# Altium PCB MiniBox.PcbDoc
Units mil, origin at the board's own origin, x right, y up, seen from the top; angles counter-clockwise.
Board outline 6710 x 1581.28 mil, 2 copper layers (Top Layer, Bottom Layer); 62 components, 52 nets, 283 pads, 150 vias.
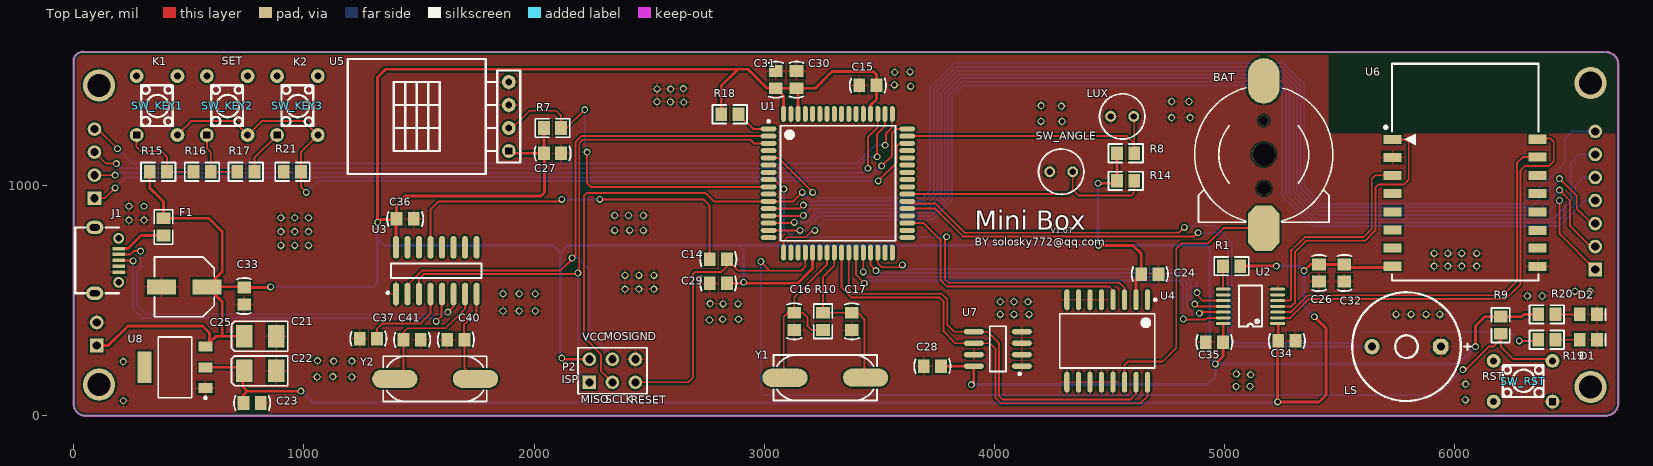
[diagram p0: Top Layer view]
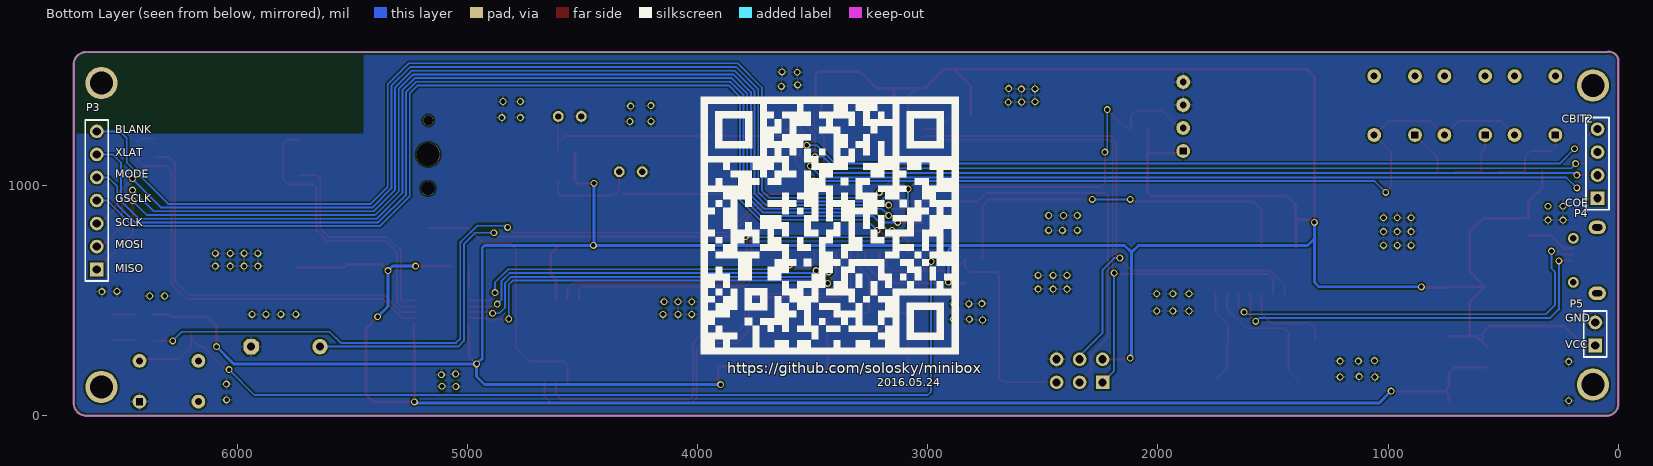
[diagram p1: Bottom Layer view, seen from below]
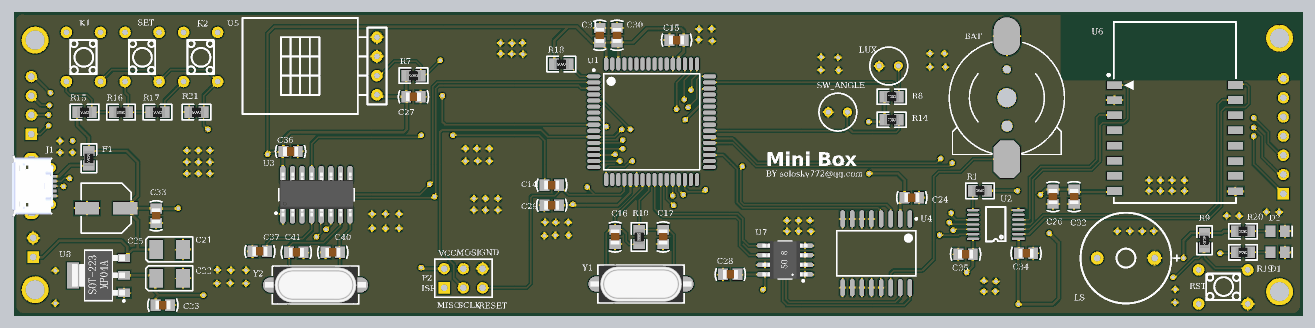
[diagram p2: 3D render of the assembled board from above, using the file's embedded part models]

## Layer stack, top to bottom
Top Solder: solder mask 0.4, Solder Resist, Dk 3.5
Top Layer: signal copper 1.4
Dielectric 1: dielectric 12.6, FR-4, Dk 4.8
Bottom Layer: signal copper 1.4
Bottom Solder: solder mask 0.4, Solder Resist, Dk 3.5

## Board outline
50,0 cw(c50,50) 0,50 0,1550 cw(c40,1540) 50,1580 6650,1580 cw(c6655,1525) 6710,1530 6710,50 cw(c6655,55) 6650,0

## Design rules (kind name [scope] priority, off if disabled: settings)
Clearance [All] p1: gap=8
MinimumSolderMaskSliver [All] p1: minsoldermaskwidth=1
PolygonConnect [All] p1: connectstyle=Relief reliefconductorwidth=10 reliefentries=4 polygonreliefangle="90 Angle" airgapwidth=10
RoutingVias [All] p1: holewidth=20 width=30 viastyle="Through Hole" minholewidth=20 minwidth=30 maxholewidth=20 maxwidth=30
SilkToSolderMaskClearance [IsPad] p1: minsilkscreentomaskgap=3 clearancetoexposedcopper=TRUE
SolderMaskExpansion [All] p1: expansion=4
UnpouredPolygon [All] p1: allowunpoured=FALSE
Width [All] p1: maxlimit=15 minlimit=8 preferedwidth=8
27 further rules are at their usual default settings.

## Components (designator, comment, footprint, x,y, rotation, side; value= is the part's Value field where it differs from the comment)
BAT "CR1220" CR1220 5170,1135 r0 top
C14 "Cap" C-0805 2800,680 r0 top
C15 "Cap" C-0805 3450,1435 r0 top
C16 "Cap" C-0805 3130,410 r90 top
C17 "Cap" C-0805 3380,410 r90 top
C21 "Cap Pol2" CAP-3528 810,345 r0 top
C22 "Cap Pol2" CAP-3528 810,195 r0 top
C23 "Cap" C-0805 775,55 r180 top
C24 "Cap" C-0805 4675,615 r180 top
C25 "Cap Pol2" CAPAE-D 480,560 r180 top
C26 "Cap" C-0805 5410,620 r90 top
C27 "Cap" C-0805 2080,1140 r180 top
C28 "Cap" C-0805 3730,215 r0 top
C29 "Cap" C-0805 2800,575 r180 top
C30 "Cap" C-0805 3140,1460 r90 top
C31 "Cap" C-0805 3050,1460 r90 top
C32 "Cap" C-0805 5520,620 r90 top
C33 "Cap" C-0805 740,520 r270 top
C34 "Cap" C-0805 5270,325 r0 top
C35 "Cap" C-0805 4955,320 r180 top
C36 "Cap" C-0805 1440,855 r180 top
C37 "Cap" C-0805 1280,335 r0 top
C40 "Cap" C-0805 1660,330 r0 top
C41 "Cap" C-0805 1470,330 r180 top
D1 "ST_LED" LED-0805 6580,330 r0 top
D2 "PW_LED" LED-0805 6580,440 r0 top
F1 "Fuse 1" 0805-1 390,820 r90 top
J1 "USB_M" USB_MICRO_5S_B 195,675 r270 top
LS "Buzzer" BEEP-S 5790,300 r180 top
LUX "LUX" AX_2.54 4605,1300 r180 top
P2 "ISP" HDR2X3 2240,145 r0 top
P3 "COL_OUT" HDR1X7 6610,635 r90 bottom locked
P4 "ROW_OUT" HDR1X4 90,945 r90 bottom locked
P5 "PW_OUT" HDR1X2 100,305 r90 bottom locked
R1 "Res2" 0805-1 5030,650 r0 top
R7 "Res2" 0805-1 2080,1250 r180 top
R8 "Res2" 0805-1 4570,1140 r180 top
R9 "Res2" 0805-1 6199,393 r90 top
R10 "Res2" 0805-1 3255,410 r90 top
R14 "Res2" 0805-1 4570,1020 r180 top
R15 "Res2" 0805-1 367.4,1060 r180 top
R16 "Res2" 0805-1 557.4,1060 r180 top
R17 "Res2" 0805-1 747.4,1060 r180 top
R18 "Res2" 0805-1 2850,1310 r180 top
R19 "Res2" 0805-1 6400,330 r180 top
R20 "Res2" 0805-1 6400,440 r180 top
R21 "Res2" 0805-1 950,1060 r180 top
SW_ANGLE "SW-PB" AX_2.54 4340,1060 r180 top
SW_KEY1 "SW-PB" SW_B 470,1180 r90 top
SW_KEY2 "SW-PB" SW_B 775,1180 r90 top
SW_KEY3 "SW-PB" SW_B 1080,1180 r90 top
SW_RST "SW-PB" SW_B 6464,258 r180 top
U1 "ATmega128L-8AC" 64A_N 3320,1010 r0 top locked
U2 "TXB0104" TSSOP-14 5230,400 r180 top
U3 "CH340G" SOIC-16 1575,630 r90 top
U4 "DS3231" SOIC-16W 4490,325 r270 top
U5 "DHT22" DHTxx 1940,1100 r90 top
U6 "ESP-12" ESP_12 5730,1200 r0 top locked
U7 "AT24Cxx" SOIC-8 4015,290 r180 top
U8 "AMS1117" SOT223 440,210 r90 top
Y1 "16MHz" X-SM49 3265,165 r180 top
Y2 "12MHz" X-SM49 1570,160 r180 top

## Footprints (in the part's own frame and the unit in brackets; to place one, negate y for a bottom-side part, rotate by r counter-clockwise, add the part's x,y. Pads: shape width x height; smd on the part's side, far side on the other; paste and mask are expansions set on the pad)
64A_N [mm] "Thin QFP, 64-Leads, Body 14x14mm, Pitch 0.8mm, IPC Medium Density"
  oval 1.75x0.55 smd: 1(-7.65,6) 2(-7.65,5.2) 3(-7.65,4.4) 4(-7.65,3.6) 5(-7.65,2.8) 6(-7.65,2) 7(-7.65,1.2) 8(-7.65,0.4) 9(-7.65,-0.4) 10(-7.65,-1.2) 11(-7.65,-2) 12(-7.65,-2.8) 13(-7.65,-3.6) 14(-7.65,-4.4) 15(-7.65,-5.2) 16(-7.65,-6) 33(7.65,-6) 34(7.65,-5.2) 35(7.65,-4.4) 36(7.65,-3.6) 37(7.65,-2.8) 38(7.65,-2) 39(7.65,-1.2) 40(7.65,-0.4) 41(7.65,0.4) 42(7.65,1.2) 43(7.65,2) 44(7.65,2.8) 45(7.65,3.6) 46(7.65,4.4) 47(7.65,5.2) 48(7.65,6)
  oval 0.55x1.75 smd: 17(-6,-7.65) 18(-5.2,-7.65) 19(-4.4,-7.65) 20(-3.6,-7.65) 21(-2.8,-7.65) 22(-2,-7.65) 23(-1.2,-7.65) 24(-0.4,-7.65) 25(0.4,-7.65) 26(1.2,-7.65) 27(2,-7.65) 28(2.8,-7.65) 29(3.6,-7.65) 30(4.4,-7.65) 31(5.2,-7.65) 32(6,-7.65) 49(6,7.65) 50(5.2,7.65) 51(4.4,7.65) 52(3.6,7.65) 53(2.8,7.65) 54(2,7.65) 55(1.2,7.65) 56(0.4,7.65) 57(-0.4,7.65) 58(-1.2,7.65) 59(-2,7.65) 60(-2.8,7.65) 61(-3.6,7.65) 62(-4.4,7.65) 63(-5.2,7.65) 64(-6,7.65)
  silkscreen extent -7.77,-6.35 6.35,6.95, body extent -7,-7 7,7, height 1.2
0805-1 [mm] "0805带丝印"
  rect 1.3x1.5 smd: 1(-0.95,0) 2(0.95,0)
  silkscreen extent -1.91,-1.02 1.91,1.02, body extent -1,-0.62 1,0.63, height 0.5
AX_2.54 [mm]
  round 1.2 hole 0.7: 1(0,0) 2(2.54,0)
  silkscreen extent -1.23,-2.5 3.77,2.5
BEEP-S [mm] "有源蜂鸣器"
  oct 1.7x1.7 hole 0.9: 1(-3.8,0)
  round 1.7 hole 0.9: 2(3.8,0)
  silkscreen extent -7.11,-6 6,6
C-0805 [mm] "贴片电容"
  rect 1.3x1.5 smd: 1(-0.95,0) 2(0.95,0)
  silkscreen extent -2,-0.79 2,0.79, body extent -1,-0.6 1,0.6, height 0.95
CAP-3528 [mm] "钽电容"
  rect 1.8x2.5 smd: 1(-1.778,0) 2(1.778,0)
  silkscreen extent -3.17,-1.65 3.05,1.65, body extent -1.91,-1.4 1.91,1.4, height 1.1
CAPAE-D [mm] "Aluminum Electrolytic Capacitor, Body 6.60x6.60x5.50mm, IPC Medium Density"
  rect 3.2x1.65 smd: 1(-2.525,0) 2(2.525,0)
  silkscreen extent -3.3,-3.3 3.3,3.3, body extent -3.3,-3.3 3.3,3.3, height 5.5
CR1220 [mm] "钮扣电池"
  round 2.54 hole 2.54: 0(0,0)
  round 1.1 hole 1.1: 0(0,3.75)
  round 1.5 hole 1.5: 0(0.025,-3.75)
  oct 3.5x5 smd: 1(0,-8.128)
  oval 3.5x5 smd: 2(0,8.128)
  silkscreen extent -7.62,-7.5 7.62,7.36
DHTxx [mil]
  round 60 hole 30 square: 1(50,50)
  round 60 hole 30: 2(150,50) 3(250,50) 4(350,50)
  silkscreen extent -50,0 450,750
ESP_12 [mm]
  rect 2x1 smd: 1(0,0) 2(0,-1.97) 3(0,-3.97) 4(0,-5.94) 5(0,-7.98) 6(0,-9.99) 7(0,-11.98) 8(0,-13.99) 9(16,-14.03) 10(16,-11.99) 11(16,-10.03) 12(16,-8.01) 13(16,-5.95) 14(16,-3.97) 15(16,-1.95) 16(16,0.03)
  silkscreen extent -0.91,-15.57 16.08,8.37
HDR1X2 [mm] "Connector; Header; 2 Position"
  rect 1.5x1.5 hole 0.9: 1(0,0)
  round 1.5 hole 0.9: 2(2.54,0)
  silkscreen extent -1.27,-1.27 3.81,1.27
HDR1X4 [mm] "Connector; Header; 4 Position"
  rect 1.5x1.5 hole 0.9: 1(0,0)
  round 1.5 hole 0.9: 2(2.54,0) 3(5.08,0) 4(7.62,0)
  silkscreen extent -1.27,-1.27 8.89,1.27
HDR1X7 [mm] "Connector; Header; 7 Position"
  rect 1.5x1.5 hole 0.9: 1(0,0)
  round 1.5 hole 0.9: 2(2.54,0) 3(5.08,0) 4(7.62,0) 5(10.16,0) 6(12.7,0) 7(15.24,0)
  silkscreen extent -1.27,-1.27 16.51,1.27
HDR2X3 [mm] "Connector; Header; 3x2 Position"
  rect 1.5x1.5 hole 0.9: 1(0,0)
  round 1.5 hole 0.9: 2(0,2.54) 3(2.54,0) 4(2.54,2.54) 5(5.08,0) 6(5.08,2.54)
  silkscreen extent -1.27,-1.27 6.35,3.81
LED-0805 [mm] "贴片LED"
  rect 1.3x1.5 smd: 1(-0.95,0) 2(0.95,0)
  silkscreen extent 1.91,-0.64 1.91,0.64
SOIC-8 [mm]
  oval 2.2x0.6 smd: 1(-2.654,1.905) 2(-2.654,0.635) 3(-2.654,-0.635) 4(-2.654,-1.905) 5(2.654,-1.905) 6(2.654,-0.635) 7(2.654,0.635) 8(2.654,1.905)
  silkscreen extent -2.53,-2.5 0.9,2.88, body extent -3,-2.45 3,2.45, height 1.7
SOIC-16 [mm]
  oval 2.5x0.7 smd: 1(-2.577,4.445) 2(-2.577,3.175) 3(-2.577,1.905) 4(-2.577,0.635) 5(-2.577,-0.635) 6(-2.577,-1.905) 7(-2.577,-3.175) 8(-2.577,-4.445) 9(2.577,-4.445) 10(2.577,-3.175) 11(2.577,-1.905) 12(2.577,-0.635) 13(2.577,0.635) 14(2.577,1.905) 15(2.577,3.175) 16(2.577,4.445)
  silkscreen extent -2.57,-5 0.8,5.47, body extent -2.88,-4.92 2.92,4.88, height 1.75
SOIC-16W [mm] "SOIC"
  oval 2.3x0.6 smd: 1(-4.55,4.445) 2(-4.55,3.175) 3(-4.55,1.905) 4(-4.55,0.635) 5(-4.55,-0.635) 6(-4.55,-1.905) 7(-4.55,-3.175) 8(-4.55,-4.445) 9(4.55,-4.445) 10(4.55,-3.175) 11(4.55,-1.905) 12(4.55,-0.635) 13(4.55,0.635) 14(4.55,1.905) 15(4.55,3.175) 16(4.55,4.445)
  silkscreen extent -4.67,-5.25 3,5.42, body extent -3.75,-5.15 3.75,5.15, height 2.65
SOT223 [mm]
  rect 1.1x1.55 smd: 1(-2.3,-3.375) 2(0,-3.375) 3(2.3,-3.375)
  rect 3.45x1.55 smd: 4(0,3.375)
  silkscreen extent -3.5,-3.48 3.35,1.85, body extent -3.25,-3.48 3.25,3.48, height 1.7
SW_B [mil]
  round 60 hole 30 square: 1(39.37,196.85)
  round 60 hole 30: 2(39.37,19.68) 3(295.28,196.85) 4(295.28,19.68)
  silkscreen extent 79,39 256,177
TSSOP-14 [mil]
  rect 65x12.5 smd: 1(0,0)
  oval 65x12.5 smd: 2(0,-25) 3(0,-50) 4(0,-75) 5(0,-100) 6(0,-125) 7(0,-150) 8(236,-150) 9(236,-125) 10(236,-100) 11(236,-75) 12(236,-50) 13(236,-25) 14(236,0)
  silkscreen extent 68,-166 169,13
USB_MICRO_5S_B [mil] "USB Micro SMT 5S B"
  rect 15x54 smd: 1(-51,0) 2(-25.5,0) 3(0,0) 4(25.5,0) 5(51,0)
  oval 59.06x74.8 hole 27.56 slot 43.31 at 90 deg: 6(143,-104) 7(-143,-104)
  round 47.24 hole 27.5: 8(-95.5,0) 9(95.5,0)
  silkscreen extent -143,-189 143,0, body extent -161,-204 161,9, height 105
X-SM49 [mm]
  oval 5x2 smd: 1(4.45,0.004) 2(-4.45,-0.004)
  silkscreen extent -5.7,-2.5 5.72,2.5, body extent -6.7,-2.46 6.7,2.44, height 4

## Part data
BAT: library part Battery, "Multicell Battery"
C14 C15 C16 C17 C23 C24 C26 C27 C28 C29 C30 C31 C32 C33 C34 C35 C36 C37 C40 C41: "Capacitor"
C21 C22 C25: "Polarized Capacitor (Axial)"
D1 D2: library part LED2, "Typical RED, GREEN, YELLOW, AMBER GaAs LED"
F1: "Fuse"
J1: "Micro/Mini USB"
LS: "Magnetic Transducer Buzzer"
P2: library part "Header 3X2", "Header, 3-Pin, Dual row"
P3: library part "Header 7", "Header, 7-Pin"
P4: library part "Header 4", "Header, 4-Pin"
P5: library part "Header 2", "Header, 2-Pin"
R1 R7 R8 R9 R10 R14 R15 R16 R17 R18 R19 R20 R21: "Resistor"
SW_ANGLE SW_KEY1 SW_KEY2 SW_KEY3 SW_RST: "Switch"
U1: "8-Bit AVR Microcontroller with 128K Bytes of In-System Programmable Flash Memory"
Y1 Y2: library part XTAL, "Crystal Oscillator"

## Free pads (board coordinates)
  round 140 hole 100: 0(110,1435) 1(110,135) 2(6590,1445) 3(6590,125)

## Via types
v1: diameter 30, hole 20, Top Layer to Bottom Layer, 150 vias

## Nets (pads, with @x,y where several pads share a name; then routed paths per layer and width w, separated by ;. In a path a pad name is that pad's centre, name@x,y a point inside that pad or via, vN(x,y) a via of type N, cw(c..) or ccw(c..) an arc to the next point about the centre after c; other vN are vias at no path point)
ADC_KEY: R21.1 SW_KEY1.2 SW_KEY2.2 SW_KEY3.2 U1.46 | length 3740.6
  Top Layer w8: SW_KEY1.2 450.32,1220.32 510,1280 694.69,1280 SW_KEY2.2 815.95,1280 999.69,1280 SW_KEY3.2 987.4,1146.46 R21.1 987.4,992.6 v1(1010,970) ; v1(3495,1020) 3574.73,1099.73 3574.73,1170 3587.96,1183.23 U1.46
  Bottom Layer w8: v1(1010,970) 1059,1019 3494,1019 v1(3495,1020)
BLANK: P3.7 U1.5 | length 4873.5
  Top Layer w8: U1.5 3059.76,1120.24 v1(3210,970)
  Bottom Layer w8: v1(3210,970) 3233,947 3689.37,947 3720,977.63 3720,1425.76 3825.24,1531 5254.76,1531 5346,1439.76 5346,994 5420,920 6300,920 6480,1100 6480,1205 6510,1235 P3.7
BUZZER: LS.2 U1.37 | length 2526.9
  Top Layer w8: U1.37 3742.61,899.76 3863.37,779 4869,779 v1(4885,795)
  Bottom Layer w8: v1(4885,795) 4965,795 5015,745 5015,325 5040,300 LS.2
C_BIT0: P4.2 U1.51 | length 3626.5
  Top Layer w8: P4.2 v1(180,1045) ; v1(3450,1075) 3450,1210 3493.23,1253.23 U1.51
  Bottom Layer w8: v1(180,1045) 190,1055 3430,1055 v1(3450,1075)
C_BIT1: P4.3 U1.50 | length 3650.3
  Top Layer w8: P4.3 140,1095 v1(185,1095) ; v1(3490,1125) 3490,1225 3524.72,1259.72 U1.50
  Bottom Layer w8: v1(185,1095) 205,1075 3404.44,1075 3454.44,1125 v1(3490,1125)
C_BIT2: P4.4 U1.49 | length 3679.4
  Top Layer w8: P4.4 105,1245 v1(190,1160) ; v1(3525,1175) 3529,1179 3529,1226.63 3556.22,1253.85 U1.49
  Bottom Layer w8: v1(190,1160) 255,1095 3401.82,1095 3481.82,1175 v1(3525,1175)
C_OE: P4.1 U1.48 | length 3714.5
  Top Layer w8: P4.1 135,945 v1(180,990) ; v1(3510,1085) 3555,1130 3555,1230 3571.22,1246.22 U1.48
  Bottom Layer w8: v1(180,990) 225,1035 3460,1035 v1(3510,1085)
DINT: U1.8 U4.3 | length 2015.5
  Top Layer w8: U1.8 3044.25,1025.75 v1(3085,985) ; v1(3792.5,777.5) 3787.5,777.5 3785,775 3785,592.63 3800.22,577.41 4542.59,577.41 4565,555 U4.3
  Bottom Layer w8: v1(3085,985) 3085,815 3125,775 3790,775 v1(3792.5,777.5)
DRST#: U1.35 U4.4 | length 1157.9
  Top Layer w8: U1.35 3693.04,836.77 3765,764.81 3765,590 3793.59,561.41 4498.59,561.41 4515,545 U4.4
DTR#: C14.1 U3.13 | length 1639.6
  Top Layer w8: U3.13 1550,896.7 1583.3,930 2110,930 v1(2120,940) ; v1(2285,940) 2735,940 2762.6,912.4 C14.1
  Bottom Layer w8: v1(2120,940) v1(2285,940)
GND: BAT.2 C15.1 C16.1 C17.1 C21.2 C22.2 C23.1 C24.1 C25.2 C26.1 C27.1 C28.1 C29.2 C30.2 C31.2 C32.1 C33.2 C34.2 C35.2 C36.1 C37.1 C40.1 C41.1 D1.2 D2.2 J1.5 LS.1 LUX.2 P2.6 P5.2 R21.2 SW_ANGLE.2 SW_RST.1 U1.22 U1.53 U1.63 U2.7 U3.1 U4.5 U4.6 U4.7 U4.8 U4.9 U4.10 U4.11 U4.12 U4.13 U5.3 U5.4 U6.2 U6.9 U7.1 U7.2 U7.3 U7.4 U7.7 U8.1
  other v1: 215,65 6046,69 5050,127 5110,128 6047,137 1057,168 1208,168 1126,170 5113,178 5051,181 215,235 1129,237 1208,237 1059,239 2762,416 2819,419 2888,419 4025,440 4085,440 4150,440 5745,440 5810,440 5875,440 5935,440 1865,455 1935,455 2005,455 2821,486 2886,486 2765,487 4025,495 4085,495 4145,495 6315,520 6380,520 1865,530 1935,530 2005,530 6588,539 6522,540 2395,550 2455,550 2520,550 2395,610 2455,610 2520,610 5910,650 5970,650 6030,650 6095,650 5910,705 5970,705 6030,705 6095,705 900,740 960,740 1020,740 900,800 960,800 1020,800 2350,805 2415,805 2475,805 240,850 305,850 900,860 960,860 1020,860 2350,870 2410,870 2475,870 240,910 4294,1278 4202,1279 4770,1295 4850,1295 4291,1345 4203,1347 2650,1362 2592,1363 2534,1364 4770,1365 4845,1365 2593,1419 2534,1420 2648,1421 3636,1431 3565,1437 3567,1492 3633,1494
GSCLK: P3.4 U1.17 | length 4679
  Top Layer w8: U1.17 3083.78,758.78 3100,775 3180,775 3210,805 v1(3220,805)
  Bottom Layer w8: v1(3220,805) 3266,851 3729.14,851 3816,937.86 3816,1386 3865,1435 5215,1435 5250,1400 5250,954.24 5380.24,824 6454,824 6565,935 P3.4
LED_ST: R19.2 U1.38 | length 3306.1
  Top Layer w8: U1.38 3629.85,922.59 3742.41,922.59 3870,795 4801.55,795 v1(4825,818.45) ; v1(6280,325) 6357.6,325 R19.2
  Bottom Layer w8: v1(4825,818.45) 4831.55,825 4957.63,825 5027.63,755 5031,755 5031,335 5050,316 5550,316 5599,365 6240,365 v1(6280,325)
LUX_DATA: LUX.1 R8.1 U1.47 | length 1160.5
  Top Layer w8: U1.47 4575.28,1214.72 4607.4,1182.6 ; LUX.1 4607.4,1297.6 4607.4,1182.6 ; R8.1 4607.4,1182.6
MISO: P3.1 U1.13 | length 4857.8
  Top Layer w8: U1.13 3168.27,868.27 v1(3170,870) ; v1(6455,935) 6455,790 P3.1
  Bottom Layer w8: v1(3170,870) 3199,899 3709.25,899 3768,957.75 3768,1405.88 3845.12,1483 5234.88,1483 5298,1419.88 5298,974.12 5400.12,872 6392,872 v1(6455,935)
MODE: P3.5 U1.15 | length 4763.2
  Top Layer w8: U1.15 3154.72,805.28 v1(3155,805)
  Bottom Layer w8: v1(3155,805) 3174.63,805 3236.63,867 3722.51,867 3800,944.49 3800,1392.63 3858.37,1451 5221.63,1451 5266,1406.63 5266,960.86 5386.86,840 6445,840 6521,916 6521,996 6560,1035 P3.5
MOSI: P3.2 U1.12 | length 4820.1
  Top Layer w8: U1.12 3154.76,899.76 v1(3170,915) ; v1(6455,980) 6500,935 6500,825 6590,735 P3.2
  Bottom Layer w8: v1(3170,915) 3702.63,915 3752,964.37 3752,1412.51 3838.49,1499 5241.51,1499 5314,1426.51 5314,980.75 5406.75,888 6363,888 v1(6455,980)
NetBAT_1: BAT.1 U4.14 | length 1177.5
  Top Layer w8: U4.14 4565,220 4580,235 4730,235 4790,295 4790,725 4814,749 4929,749 4995,815 BAT.1
NetC16_2: C16.2 R10.1 U1.23 Y1.1 | length 791
  Top Layer w8: Y1.1@3084.8,189.83 3084.8,429.8 3102.4,447.4 C16.2 ; R10.1 3204.8,372.6 3187.4,390 3187.4,427.6 3167.6,447.4 C16.2 ; U1.23 3272.76,657.76 3130,515 C16.2
NetC17_2: C17.2 R10.2 U1.24 Y1.2 | length 704.1
  Top Layer w8: U1.24 3304.25,651.62 3253.81,601.19 3255,600 R10.2 C17.2 3407.6,447.4 3435.2,419.8 Y1.2@3435.2,190.17
NetC37_2: C37.2 U3.4 | length 386.5
  Top Layer w8: C37.2 1317.4,377.4 1340,400 1505,400 1550,445 U3.4
NetC40_2: C40.2 U3.8 Y2.2 | length 411.9
  Top Layer w8: Y2.2 1697.4,207.97 C40.2 1695,332.4 1695,395 1750,450 U3.8
NetC41_2: C41.2 U3.7 Y2.1 | length 591.8
  Top Layer w8: Y2.1 1432.6,197.62 C41.2 1432.6,362.6 1450,380 1615,380 1700,465 U3.7
NetD1_1: D1.1 R19.1 | length 105.2
  Top Layer w8: R19.1 D1.1
NetD2_1: D2.1 R20.1 | length 105.2
  Top Layer w8: R20.1 D2.1
NetF1_1: F1.1 J1.1 | length 218.4
  Top Layer w12: J1.1 236,726 292.6,782.6 F1.1
NetR1_1: R1.1 U2.8 | length 100.6
  Top Layer w8: R1.1 4992.6,551.4 U2.8
NetR15_1: R15.1 R16.2 SW_KEY1.1 | length 381.8
  Top Layer w8: SW_KEY1.1 273.15,1166.85 290,1150 380,1150 404.8,1125.2 R15.1 R16.2
NetR16_1: R16.1 R17.2 SW_KEY2.1 | length 281.5
  Top Layer w8: SW_KEY2.1 578.15,1161.85 594.8,1145.2 R16.1 R17.2
NetR17_1: R17.1 SW_KEY3.1 | length 200.1
  Top Layer w8: R17.1 784.8,1121.02 SW_KEY3.1
NetR18_1: R18.1 U1.1 | length 157.8
  Top Layer w8: R18.1 2951.18,1246.22 U1.1
RESET#: C14.2 P2.5 R9.1 SW_RST.2 U1.20 | length 5580.9
  Top Layer w8: P2.5 2670,145 2690,165 2690,615 2700,625 2815,625 2837.4,647.4 C14.2 2887.4,630 3023.7,630 ; v1(2985,670) 2985,668.7 3023.7,630 ; U1.20 3178.27,648.27 3160,630 3023.7,630 ; v1(6035,200) 6047,200 6147,300 6167.4,300 R9.1@6199,331.6 ; R9.1 R9.1@6199,331.6 ; SW_RST.2 6416.95,246 6254,246 6200,300 6200,332.6 R9.1@6199,331.6
  Bottom Layer w8: v1(2985,670) 2985,105 3000,90 5925,90 v1(6035,200)
RXD0/MISO: P2.1 U1.3 U3.3 | length 2661
  Top Layer w8: U3.3 1500,595 1520,615 2180,615 2196,631 2196,1183.37 2211.35,1198.72 2939.5,1198.72 2955,1183.23 U1.3
  Bottom Layer w8: v1(2190,620) 2190,195 P2.1
SCL: U1.25 U4.16 U7.6 | length 1966
  Top Layer w8: U1.25 3335.75,556.62 3378.37,514 3761,514 3779,496 3779,366 3830,315 U7.6 3980,315 4004,291 4004,78.37 4025,57.37 4025,54 4634,54 4665,85 U4.16
SCLK: P2.3 P3.3 U1.11 | length 6489.8
  Top Layer w8: P2.3 2290,195 2290,267 2217,340 2217,955.18 2228.82,967 2745.63,967 2781.37,931.26 U1.11 3126.26,931.26 v1(3165,970) ; v1(6455,1030) 6530,955 6530,900 6595,835 P3.3
  Bottom Layer w8: v1(3165,970) 3204,931 3696,931 3736,971 3736,1419.14 3831.86,1515 5248.14,1515 5330,1433.14 5330,987.37 5413.37,904 6329,904 v1(6455,1030)
SDA: U1.26 U4.15 U7.5 | length 1867.1
  Top Layer w8: U1.26 3367.24,547.76 3385,530 3770,530 3795,505 3795,395 3825,365 U7.5 3970,365 4020,315 4020,85 4035,70 4590,70 4615,95 U4.15
SW_ANGLE: R14.1 SW_ANGLE.1 U1.39 | length 1138.5
  Top Layer w8: U1.39 4320,962.76 4340,982.76 ; SW_ANGLE.1 4340,982.76 ; R14.1 4607.4,970 4593.6,956.2 4366.56,956.2 4340,982.76
TM_DATA: R7.1 U1.9 U5.2 | length 1575.6
  Top Layer w8: U5.2 1905,1250 1980,1325 2095,1325 2117.4,1302.6 R7.1 2140,1250 v1(2220,1330) ; v1(2230,1145) 2230,1010 2245.75,994.25 U1.9
  Bottom Layer w8: v1(2220,1330) 2220,1155 v1(2230,1145)
TXD0/MOSI: P2.4 U1.2 U3.2 | length 2693
  Top Layer w8: U3.2 1450,567.63 1513.37,631 2116,631 2180,695 2180,1190 2204.72,1214.72 U1.2
  Bottom Layer w8: v1(2165,685) 2190,685 2240,635 2240,360 2340,260 P2.4
UD+: J1.3 U3.5 | length 1743.4
  Top Layer w8: J1.3 256,675 v1(258,673) ; v1(1575,410) 1598,433 1598,528.54 U3.5
  Bottom Layer w8: v1(258,673) 258,462 295,425 1560,425 v1(1575,410)
UD-: J1.2 U3.6 | length 1801
  Top Layer w8: J1.2 245.5,700.5 260,715 v1(290,715) ; v1(1625,450) 1650,475 U3.6
  Bottom Layer w8: v1(290,715) 290,640 275,625 275,480 314,441 1616,441 v1(1625,450)
VCC: C15.2 C21.1 C24.2 C25.1 C27.2 C28.2 C29.1 C30.1 C31.1 C33.1 C35.1 C36.2 F1.2 P2.2 P5.1 R7.2 R8.2 R9.2 R14.2 R15.2 R18.2 R20.2 U1.21 U1.52 U1.62 U1.64 U2.14 U3.16 U4.2 U5.1 U7.8 U8.3 | length 17066.2
  Top Layer w12: P5.1 150,305 235,390 560,390 590,360 U8.3@590,317.68 ; R15.2 330,990 375,945 390,930 F1.2 587.6,857.4 644.7,800.3 644.7,625.3 C25.1 ; U8.3 U8.3@590,317.68 ; C21.1 645,345 ; v1(855,560) 852.4,557.4 C33.1 737.4,560 C25.1 ; U3.16 C36.2@1400,852.4 ; U5.1 1900,1140 C27.2 ; R7.2 C27.2 ; v1(2120,250) 2125,245 P2.2 ; R18.2 2812.6,1432.6 2885,1505 ; C29.1 3145,575 3209.76,639.76 U1.21 ; U1.64 3083.78,1388.82 C31.1 ; U1.62 3146.77,1415.83 C30.1 ; U1.52 3461.73,1348.96 3487.4,1374.63 C15.2 3487.4,1482.6 3475,1495 3295,1495 3222.6,1422.6 C30.1 ; C28.2 U7.8 3910.51,145.51 v1(3900,135) ; v1(4450,1010) 4522.6,1010 R14.2 R8.2 ; v1(4452.5,740) 4602.6,740 4637.6,705 C24.2 4615,592.4 U4.2 ; v1(4960,225) 4992.4,257.4 C35.1 4994,321.6 U2.14 ; v1(6090,300) 6090,390 6130.4,430.4 R9.2 6290.4,430.4 6300,440 R20.2 ; C25.1 645,494.41 645,345 ; U8.3@590,317.68 617.32,345 645,345 ; C36.2@1400,852.4 C36.2 1402.6,917.6 1440,955 2030,955 2045,970 2045,1137.6 C27.2 ; C36.2@1400,852.4 1332.4,852.4 v1(1320,840) 1320,1470 1355,1505 2885,1505 ; 2885,1505 2930,1505 3012.4,1422.6 C31.1 ; C31.1 C30.1
  Bottom Layer w12: v1(855,560) 1300,560 1320,580 1320,770 ; v1(1320,840) 1320,770 ; v1(2120,250) 2115,255 2115,710 ; v1(2910,580) 2910,720 2890,740 ; v1(3900,135) 4925,135 4960,170 v1(4960,225) ; v1(4450,1010) v1@4450,740 ; v1(6090,300) 6015,225 v1(4960,225) ; 1320,770 1350,740 2085,740 2115,710 ; 2115,710 2145,740 2890,740 ; 2890,740 v1@4450,740 ; v1@4450,740 4925,740 4935,730 4935,245 4940,245 v1(4960,225)
VCC33: C22.1 C23.2 C26.2 C32.2 C34.1 R1.2 U2.1 U6.8 U8.2 | length 6652.4
  Top Layer w12: U8.2 710,210 735,185 735,125 753.47,106.53 ; C23.2@737.6,65 737.6,90.65 753.47,106.53 ; v1(986.53,106.53) 753.47,106.53 ; R1.2 v1(5225,650) ; U2.1 5232.6,397.4 C34.1 5225,317.4 5230,312.4 v1(5230,60) 5410,60 5440,90 5440,380 v1(5390,430) ; v1(5345,630) 5372.4,657.4 C26.2 C32.2 5533.19,644.21 U6.8@5740,644.21
  Bottom Layer w12: v1(986.53,106.53) 1038.06,55 5155,55 5225,55 v1(5230,60) ; v1(5225,650) 5325,650 v1(5345,630) 5345,475 v1(5390,430)
WIFI_EN#: U1.30 U2.10 | length 1654.9
  Top Layer w8: U1.30 3493.23,661.77 3510,645 3590,645 v1(3600,655) ; v1(4880,535) 4880,525 4905,500 U2.10
  Bottom Layer w8: v1(3600,655) 3619,636 4823.3,636 4880,579.3 v1(4880,535)
WIFI_EN_33#: U2.5 U6.3 | length 980.1
  Top Layer w8: U2.5 5284,500 5289,505 5289,720 5292.37,720 5348.37,776 5603.37,776 5639,811.63 5639,1030 5654,1045 5728.7,1045 U6.3
WIFI_RESET#: U1.29 U2.11 | length 1709.5
  Top Layer w8: U1.29 3461.73,653.27 v1(3485,630) ; v1(4870,485) 4880,475 U2.11
  Bottom Layer w8: v1(3485,630) 3495,620 4816.67,620 4852,584.67 4852,503 v1(4870,485)
WIFI_RESET_33#: U2.4 U6.1 | length 1271.3
  Top Layer w8: U2.4 5290,475 5305,490 5305,710 5355,760 5610,760 5655,805 5655,990 5670,1005 5780,1005 5800,1025 5800,1185 5785,1200 U6.1
WIFI_RXD: U1.28 U2.12 | length 1787
  Top Layer w8: v1(3430,625) 3430.24,625.24 U1.28 ; v1(4890,445) 4895,450 U2.12
  Bottom Layer w8: v1(3430,625) 3452,603 4809.63,603 4836,576.63 4836,470 4861,445 v1(4890,445)
WIFI_RXD_33: U2.3 U6.15 | length 1709.4
  Top Layer w8: U2.3 5287.63,450 5361,523.37 6208.37,523.37 6270,585 6270,1098.23 6295,1123.23 U6.15
WIFI_TXD: U1.27 U2.13 | length 1873.6
  Top Layer w8: U1.27 3398.74,611.26 v1(3435,575) ; v1(4820,420) 4822,418 4918,418 4925,425 U2.13
  Bottom Layer w8: v1(3435,575) 3447,587 4803,587 4820,570 v1(4820,420)
WIFI_TXD_33: U2.2 U6.16 | length 1934.5
  Top Layer w8: U2.2 5285.25,425 5367.63,507.37 6222.37,507.37 6286,571 6286,1066 6305,1085 6410,1085 6430,1105 6430,1190 6415,1205 6363.74,1205 U6.16
XLAT: P3.6 U1.14 | length 4842.3
  Top Layer w8: U1.14 3126.77,836.77 v1(3130,840)
  Bottom Layer w8: v1(3130,840) 3187,840 3230,883 3715.88,883 3784,951.12 3784,1399.25 3851.75,1467 5228.25,1467 5282,1413.25 5282,967.49 5393.49,856 6428,856 6505,933 6505,1100 6540,1135 P3.6
pads on no net: BAT.0 J1.4 J1.6 J1.7 J1.8 J1.9 SW_KEY1.3 SW_KEY1.4 SW_KEY2.3 SW_KEY2.4 SW_KEY3.3 SW_KEY3.4 SW_RST.3 SW_RST.4 U1.4 U1.6 U1.7 U1.10 U1.16 U1.18 U1.19 U1.31 U1.32 U1.33 U1.34 U1.36 U1.40 U1.41 U1.42 U1.43 U1.44 U1.45 U1.54 U1.55 U1.56 U1.57 U1.58 U1.59 U1.60 U1.61 U2.6 U2.9 U3.9 U3.10 U3.11 U3.12 U3.14 U3.15 U4.1 U6.4 U6.5 U6.6 U6.7 U6.10 U6.11 U6.12 U6.13 U6.14 U8.4
copper on no net:
  other v1: 305,910

## Polygon pours and split planes (outlines as drawn)
GND on Top Layer "Top Layer-GND" (solid, pour order 4): 0,0 6710,0 6710,1580 0,1580
GND on Bottom Layer "Top Layer-GND" (solid, pour order 6): 0,0 6710,0 6710,1580 0,1580

## Keep-outs
Keep-Out Layer:
  the board outline again, w10

## Other copper
Top Layer:
  pour cut-out: 5450,1225 5450,1580 6710,1580 6710,1225
Bottom Layer:
  pour cut-out: 5450,1580 5450,1225 6705,1225 6710,1230 6710,1580

## Silkscreen, mask and mechanical layers (free items; w line width, h text height)
Top Overlay:
  text "SET" at 643,1512 h60
  text "K1" at 340,1510 h60
  text "K2" at 953,1507 h60
  text "V1.0T" at 4245,785 h40
  text "Mini Box" at 3915,780 h140
  text "BY solosky772@qq.com" at 3915,725 h60
  text "GND" at 2422,315 h60
  text "MOSI" at 2302,314 h60
  text "VCC" at 2210,312 h60
  text "RST" at 6120,140 h60
  text "ISP" at 2121,128 h60
  text "MISO" at 2202,40 h60
  text "SCLK" at 2310,40 h60
  text "RESET" at 2419,38 h60
Bottom Overlay:
  drawing of 9 lines, arcs and shapes, not listed
  text "CBIT2" at 245,1260 h60
  text "BLANK" at 6530,1215 h60
  text "XLAT" at 6530,1115 h60
  text "MODE" at 6530,1020 h60
  text "COE" at 230,955 h60 r180
  text "GSCLK" at 6530,915 h60
  text "SCLK" at 6530,810 h60
  text "MOSI" at 6530,715 h60
  text "MISO" at 6530,610 h60
  text "GND" at 230,395 h60
  text "VCC" at 230,280 h60
  text "https://github.com/solosky/minibox" at 3870,170 h80
  text "2016.05.24" at 3220,115 h60

## Dimensions
0,0 to 6710,0 on Mechanical 1
0,0 to 0,1580 on Mechanical 1

## Text inside footprints (layer, text, board x,y; h text height)
U6: Mechanical 13 "CUTOUT POLYGON" at 5735,1490 h10; Mechanical 13 "ANTENNA AREA" at 5735,1510 h10